# EAGLE board 9key_rev0.1 (EAGLE 8.3.1)

Size 160 x 100 mm. Coordinates in mm from the lower left corner, seen from the top.
Outline: 0,0 160,0 160,100 0,100 0,0
Copper layers (1*16): Top 0.035mm / dielectric 1.5mm / Bottom 0.035mm
Design rules "default": minimum track width 6mil, minimum drill 0.35mm, track to track 6mil, track to pad 6mil, pad to pad 6mil, via to via 6mil, smd to smd 6mil, copper to edge 40mil, drill to drill 6mil, minimum pad ring 10mil, minimum via ring 8mil, stop-mask expansion 4mil, vias tented up to drill 0mil, thermal gap 10mil

## Footprints (pad centres in the part's own frame; a part is rotated, then mirrored left to right if it is on the bottom)
PIC32MK1024MCF100 = smd 1.5 x 0.2: 1 -6.95,4.8; 2 -6.95,4.4; 3 -6.95,4; 4 -6.95,3.6; 5 -6.95,3.2; 6 -6.95,2.8; 7 -6.95,2.4; 8 -6.95,2; 9 -6.95,1.6; 10 -6.95,1.2; 11 -6.95,0.8; 12 -6.95,0.4; 13 -6.95,0; 14 -6.95,-0.4; 15 -6.95,-0.8; 16 -6.95,-1.2; 17 -6.95,-1.6; 18 -6.95,-2; 19 -6.95,-2.4; 20 -6.95,-2.8; 21 -6.95,-3.2; 22 -6.95,-3.6; 23 -6.95,-4; 24 -6.95,-4.4; 25 -6.95,-4.8; 51 6.95,-4.8; 52 6.95,-4.4; 53 6.95,-4; 54 6.95,-3.6; 55 6.95,-3.2; 56 6.95,-2.8; 57 6.95,-2.4; 58 6.95,-2; 59 6.95,-1.6; 60 6.95,-1.2; 61 6.95,-0.8; 62 6.95,-0.4; 63 6.95,0; 64 6.95,0.4; 65 6.95,0.8; 66 6.95,1.2; 67 6.95,1.6; 68 6.95,2; 69 6.95,2.4; 70 6.95,2.8; 71 6.95,3.2; 72 6.95,3.6; 73 6.95,4; 74 6.95,4.4; 75 6.95,4.8 | smd 0.2 x 1.5: 26 -4.9,-6.95; 27 -4.5,-6.95; 28 -4.1,-6.95; 29 -3.7,-6.95; 30 -3.3,-6.95; 31 -2.9,-6.95; 32 -2.5,-6.95; 33 -2.1,-6.95; 34 -1.7,-6.95; 35 -1.3,-6.95; 36 -0.9,-6.95; 37 -0.5,-6.95; 38 -0.1,-6.95; 39 0.3,-6.95; 40 0.7,-6.95; 41 1.1,-6.95; 42 1.5,-6.95; 43 1.9,-6.95; 44 2.3,-6.95; 45 2.7,-6.95; 46 3.1,-6.95; 47 3.5,-6.95; 48 3.9,-6.95; 49 4.3,-6.95; 50 4.7,-6.95; 76 4.7,6.95; 77 4.3,6.95; 78 3.9,6.95; 79 3.5,6.95; 80 3.1,6.95; 81 2.7,6.95; 82 2.3,6.95; 83 1.9,6.95; 84 1.5,6.95; 85 1.1,6.95; 86 0.7,6.95; 87 0.3,6.95; 88 -0.1,6.95; 89 -0.5,6.95; 90 -0.9,6.95; 91 -1.3,6.95; 92 -1.7,6.95; 93 -2.1,6.95; 94 -2.5,6.95; 95 -2.9,6.95; 96 -3.3,6.95; 97 -3.7,6.95; 98 -4.1,6.95; 99 -4.5,6.95; 100 -4.9,6.95

## Placement (x,y rotation side)
U1  PIC32MK1024MCF100100TQFP  [PIC32MK1024MCF100]  34,15 0 top

## Library data of the parts
U1 = clackboard_lib